# Altium PCB MainBoard.PcbDoc (part 1 of 5)
Units mm, origin at the board's own origin, x right, y up, seen from the top; angles counter-clockwise.
Board outline 82.5 x 82.5 mm, 2 copper layers (Top Layer, Bottom Layer); 145 components, 141 nets, 702 pads, 289 vias.
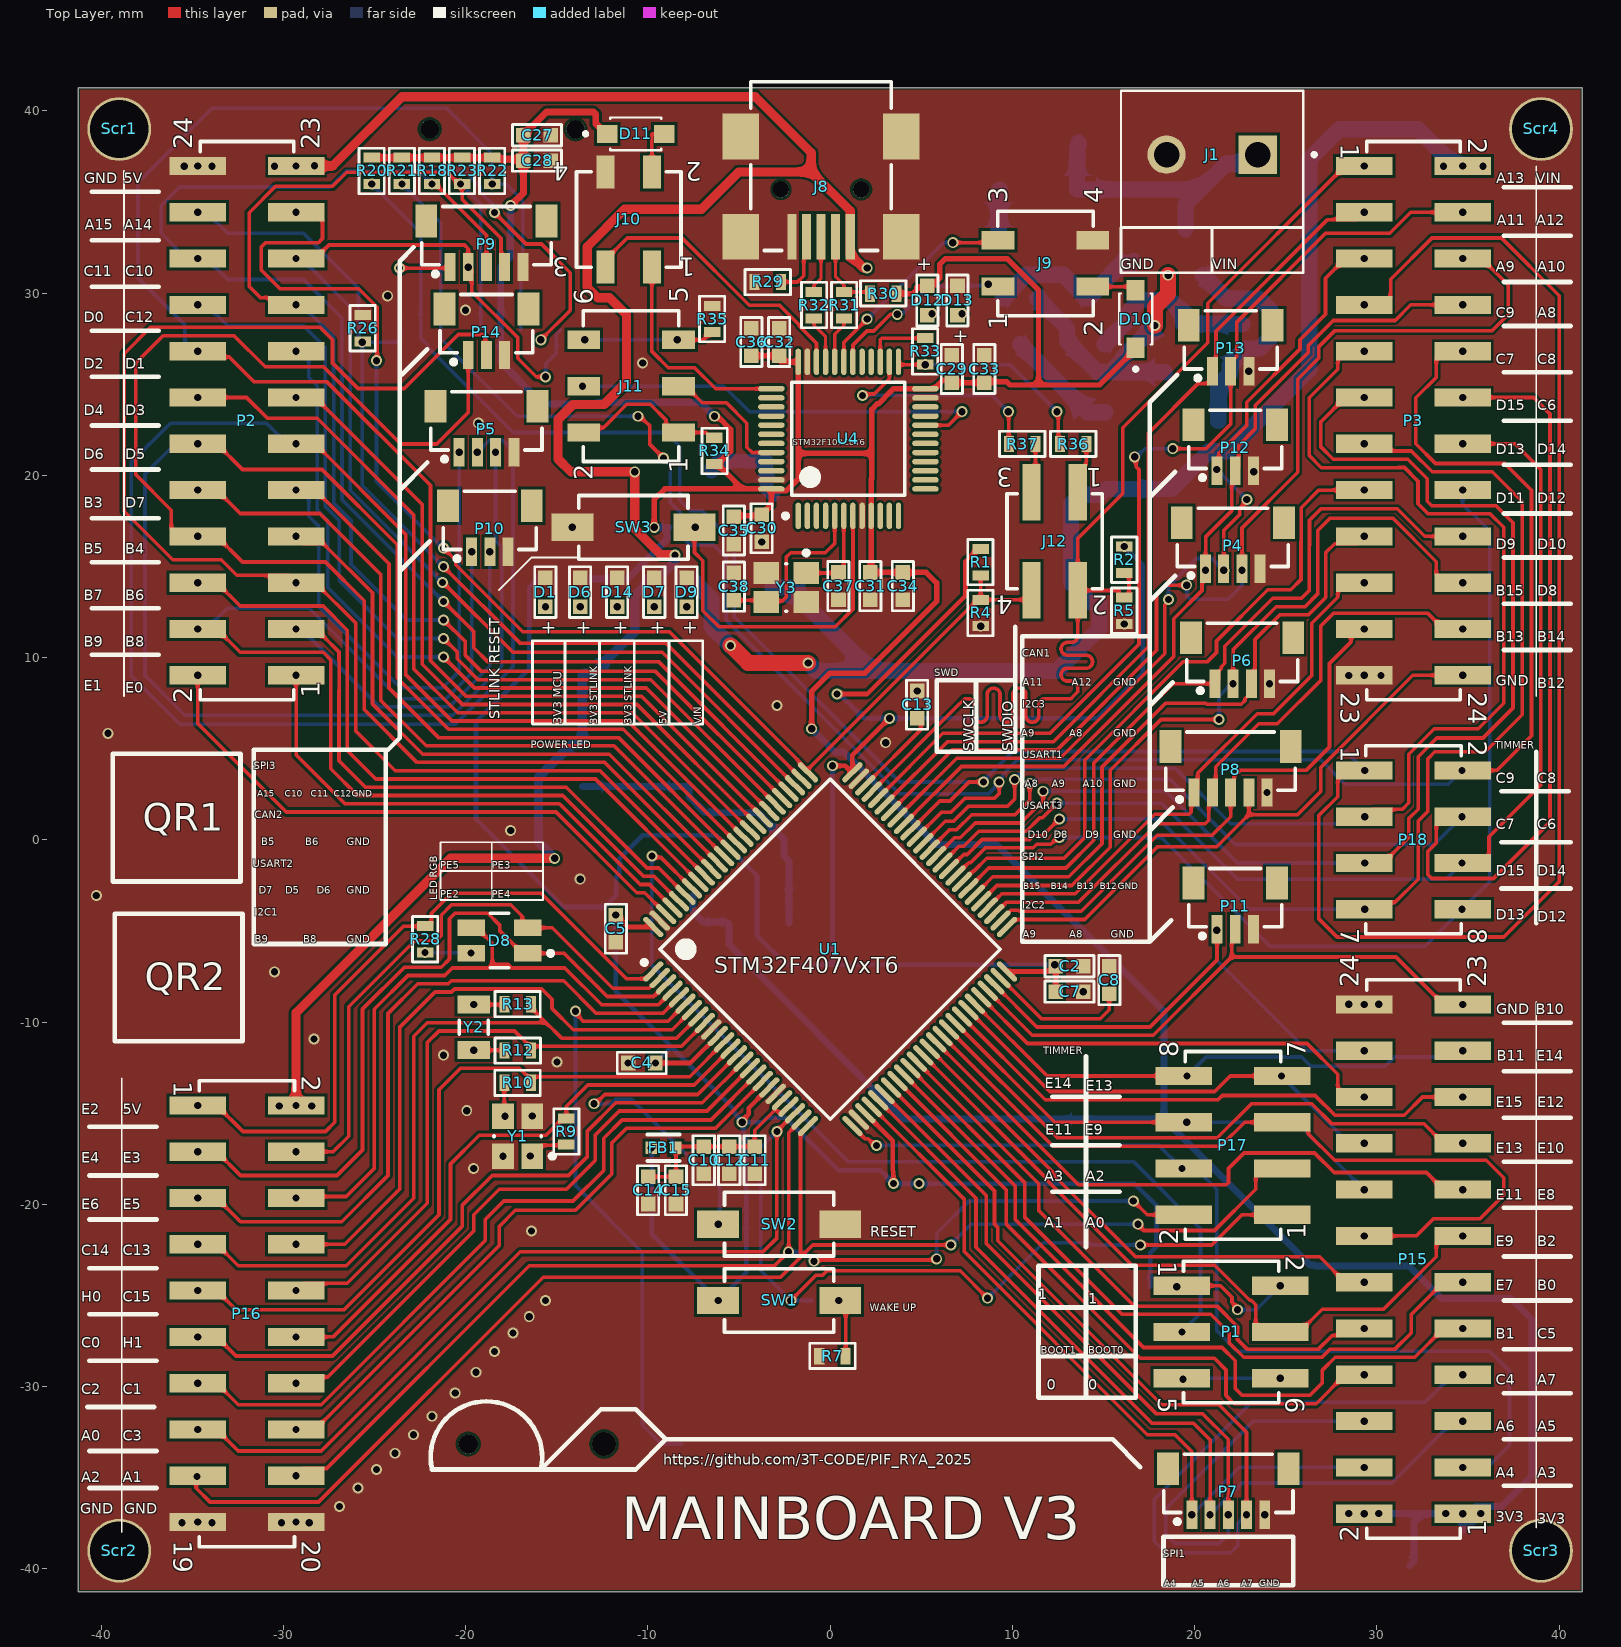
[diagram p0: Top Layer view]
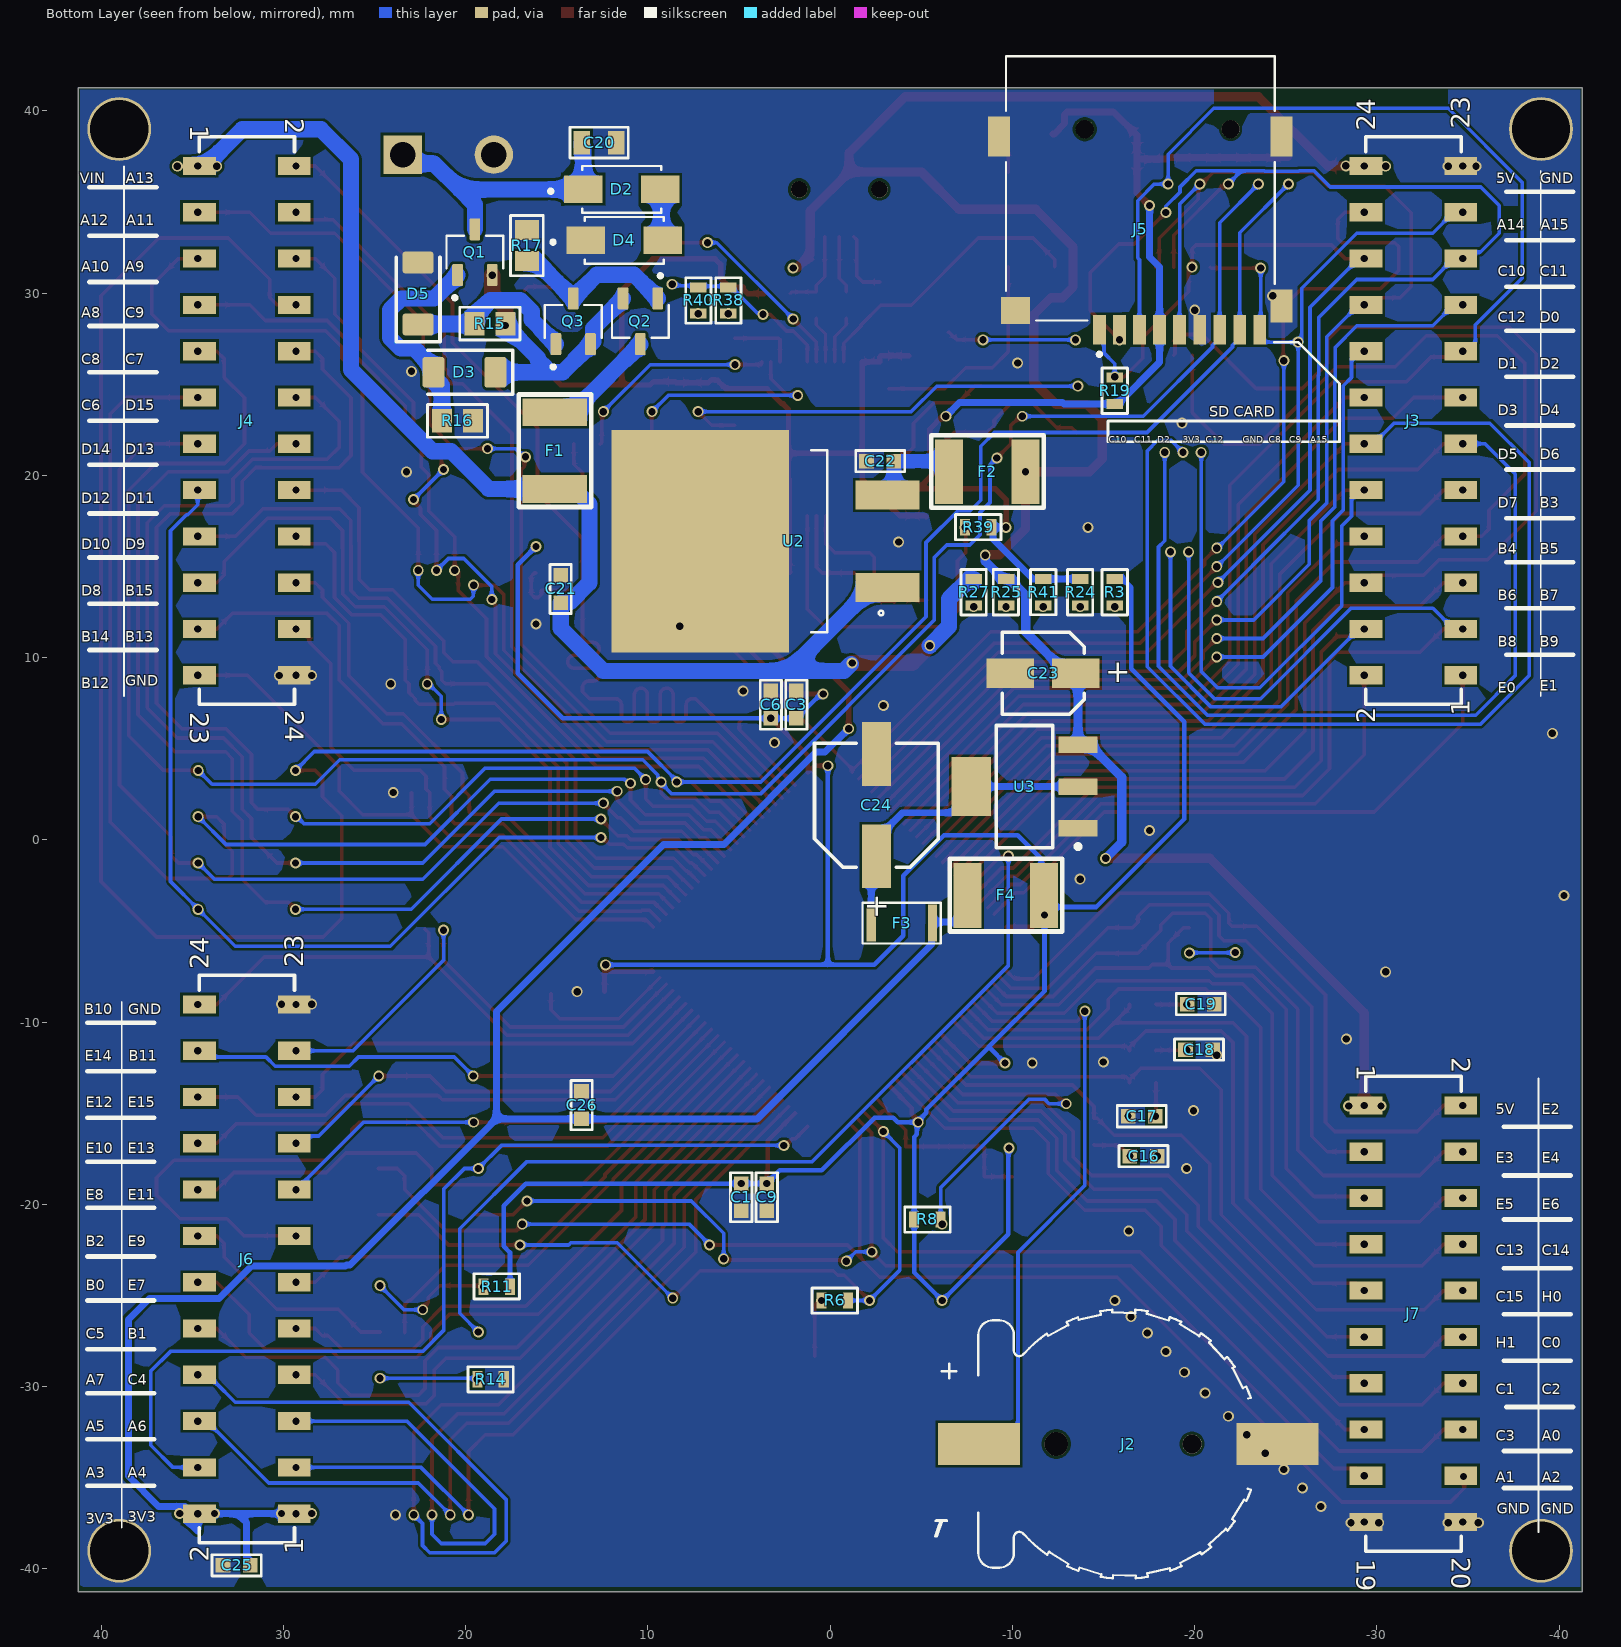
[diagram p1: Bottom Layer view, seen from below]
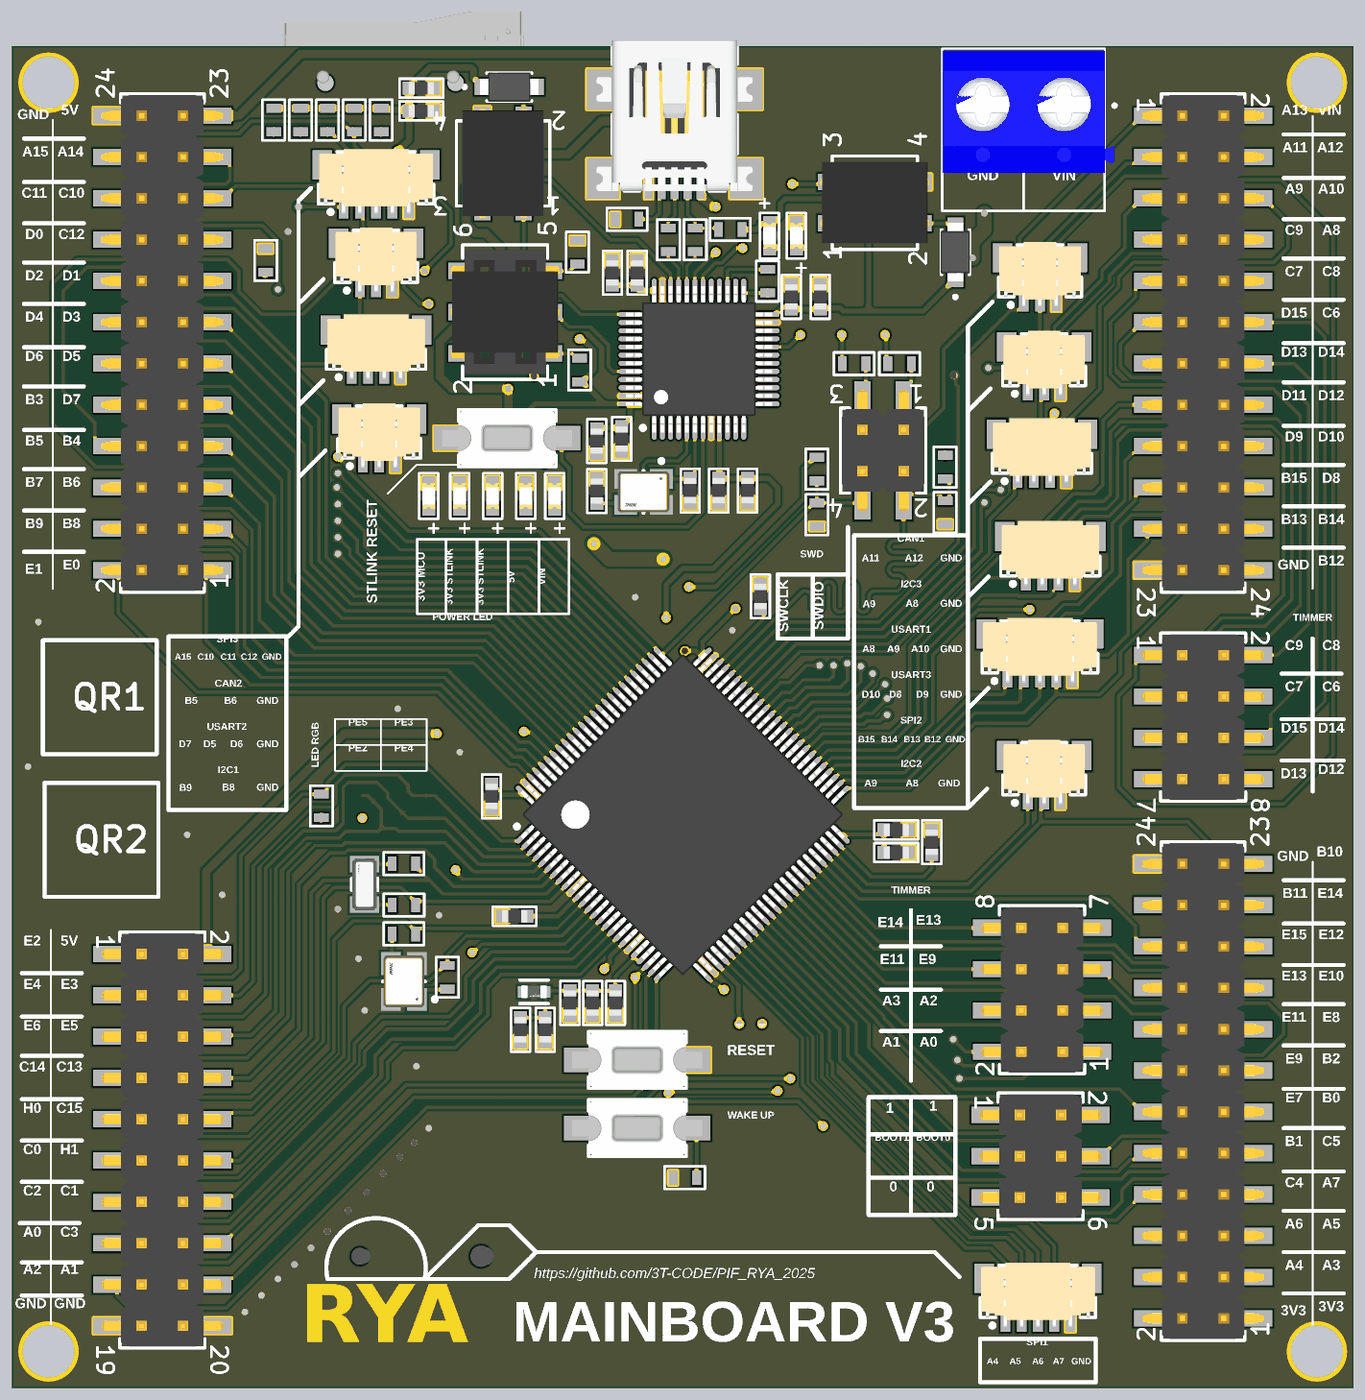
[diagram p4: 3D render of the assembled board from above, using the file's embedded part models]
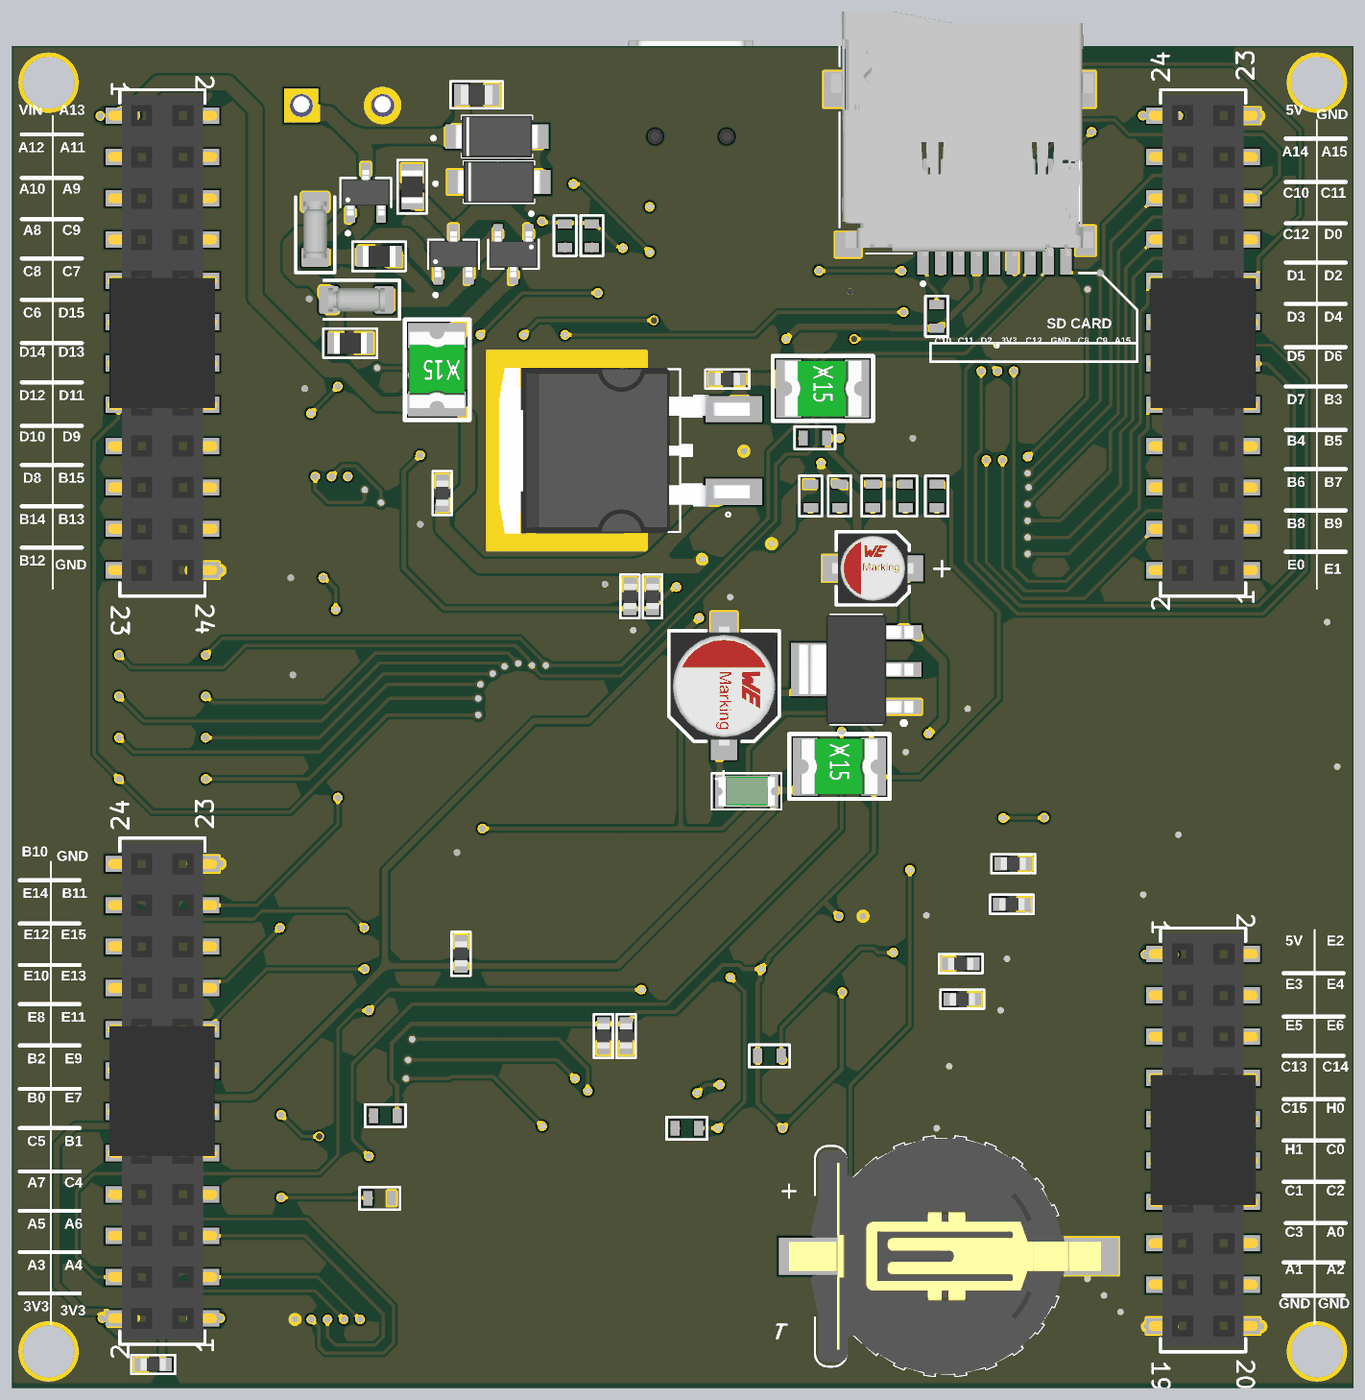
[diagram p5: 3D render of the assembled board from below, using the file's embedded part models]

## Layer stack, top to bottom
Top Solder: solder mask 0.0102, Solder Resist, Dk 3.5
Top Layer: signal copper 0.0356
Dielectric 1: dielectric 0.32, FR-4, Dk 4.8
Bottom Layer: signal copper 0.0356
Bottom Solder: solder mask 0.0102, Solder Resist, Dk 3.5

## Board outline
-41.25,-41.25 -41.25,41.25 41.25,41.25 41.25,-41.25

## Design rules (kind name [scope] priority, off if disabled: settings)
Clearance Polygon_Clearance [InPolygon] p1: gap=0.15 ignorepadtopadclearanceinfootprint=FALSE
Clearance [All] p2: gap=0.254 ignorepadtopadclearanceinfootprint=FALSE except(0.1: Arc-SMDPad SMDPad-SMDPad; 0.15: Arc-Poly Track-Poly SMDPad-Poly THPad-Poly Via-Poly Fill-Poly Poly-Poly; 0.2: Track-SMDPad)
DiffPairsRouting "Schematic Differential Pairs Routing" [InNetClass('STLINK')] p1: maxlimit=0.254 minlimit=0.254 mostfreqgap=0.254 toplayer_minwidth=0.178 toplayer_maxwidth=0.254 toplayer_prefwidth=0.178 bottomlayer_minwidth=0.178 bottomlayer_maxwidth=0.254 bottomlayer_prefwidth=0.178 maxuncoupledlength=12.7
DiffPairsRouting [All] p2: maxlimit=0.254 minlimit=0.254 mostfreqgap=0.254 toplayer_minwidth=0.381 toplayer_maxwidth=0.381 toplayer_prefwidth=0.381 bottomlayer_minwidth=0.381 bottomlayer_maxwidth=0.381 bottomlayer_prefwidth=0.381 maxuncoupledlength=12.7
MatchedLengths "Schematic Matched Net Lengths_7" [InNetClass('STL_SWD1')] p1: tolerance=25.4 checknetsindiffpair=FALSE checkdiffpairvsdiffpair=TRUE checkxsignals=TRUE checkothers=TRUE usedelayunits=TRUE delaytolerance=50.000000
MatchedLengths "Schematic Matched Net Lengths_6" [InNetClass('STL_SWD2')] p2: tolerance=25.4 checknetsindiffpair=FALSE checkdiffpairvsdiffpair=TRUE checkxsignals=TRUE checkothers=TRUE usedelayunits=TRUE delaytolerance=50.000000
MatchedLengths "Schematic Matched Net Lengths" [InNetClass('STL_SWD3')] p3: tolerance=25.4 checknetsindiffpair=FALSE checkdiffpairvsdiffpair=TRUE checkxsignals=TRUE checkothers=TRUE usedelayunits=TRUE delaytolerance=50.000000
MatchedLengths "Schematic Matched Net Lengths_5" [InNetClass('MCU_SWD')] p4: tolerance=25.4 checknetsindiffpair=FALSE checkdiffpairvsdiffpair=TRUE checkxsignals=TRUE checkothers=TRUE usedelayunits=TRUE delaytolerance=70.000000
MatchedLengths "Schematic Matched Net Lengths_4" [InNet('NetJ12_1')] p5: tolerance=25.4 checknetsindiffpair=FALSE checkdiffpairvsdiffpair=TRUE checkxsignals=TRUE checkothers=TRUE usedelayunits=TRUE delaytolerance=70.000000
MatchedLengths "Schematic Matched Net Lengths_3" [InNet('STM32_SWDIO')] p6: tolerance=25.4 checknetsindiffpair=FALSE checkdiffpairvsdiffpair=TRUE checkxsignals=TRUE checkothers=TRUE usedelayunits=TRUE delaytolerance=70.000000
MatchedLengths "Schematic Matched Net Lengths_2" [InNet('STM32_SWCLK')] p7: tolerance=25.4 checknetsindiffpair=FALSE checkdiffpairvsdiffpair=TRUE checkxsignals=TRUE checkothers=TRUE usedelayunits=TRUE delaytolerance=70.000000
MatchedLengths "Schematic Matched Net Lengths_1" [InNet('NetJ12_3')] p8: tolerance=25.4 checknetsindiffpair=FALSE checkdiffpairvsdiffpair=TRUE checkxsignals=TRUE checkothers=TRUE usedelayunits=TRUE delaytolerance=70.000000
PolygonConnect [All] p1: connectstyle=Direct reliefconductorwidth=0.254 reliefentries=4 polygonreliefangle="90 Angle" airgapwidth=0.254
RoutingVias [All] p1: holewidth=1000 width=0.9 viastyle="Through Hole" minholewidth=0.4 minwidth=0.7 maxholewidth=0.711 maxwidth=1000
SilkToSilkClearance [All] p1: silktosilkclearance=0
SilkToSolderMaskClearance [IsPad] p1: minsilkscreentomaskgap=0 clearancetoexposedcopper=TRUE
SolderMaskExpansion [All] p1: expansion=0.102 istentingtop=FALSE
SupplyNets "Schematic Supply Nets_5" [InNet('GND')] p1: voltage=0.000
SupplyNets "Schematic Supply Nets_4" [InNet('3V3_MCU_VCCA')] p2: voltage=0.000
SupplyNets "Schematic Supply Nets_3" [InNet('HD_5V')] p3: voltage=0.000
SupplyNets "Schematic Supply Nets_2" [InNet('3V3_MCU')] p4: voltage=0.000
SupplyNets "Schematic Supply Nets_1" [InNet('3V3_STL')] p5: voltage=0.000
SupplyNets "Schematic Supply Nets" [InNet('HD_Vin')] p6: voltage=0.000
Width "Schematic Width Constraint_24" [InNet('NetC22_2')] p1: maxlimit=5.08 minlimit=0.508 preferedwidth=0.762
Width "Schematic Width Constraint_23" [InNet('NetC22_2')] p2: maxlimit=5.08 minlimit=0.508 preferedwidth=0.508
Width "Schematic Width Constraint_22" [InNet('NetC24_1')] p3: maxlimit=2.54 minlimit=0.381 preferedwidth=0.381
Width "Schematic Width Constraint_21" [InNet('GND')] p4: maxlimit=12.7 minlimit=0.762 preferedwidth=0.889 minimp=50.000000 maximp=50.000000 favimp=50.000000
Width "Schematic Width Constraint_20" [InNet('NetD2_A')] p5: maxlimit=12.7 minlimit=0.762 preferedwidth=0.889 minimp=50.000000 maximp=50.000000 favimp=50.000000
Width "Schematic Width Constraint_19" [InNet('NetC20_2')] p6: maxlimit=12.7 minlimit=0.762 preferedwidth=0.889 minimp=50.000000 maximp=50.000000 favimp=50.000000
Width "Schematic Width Constraint_18" [InNet('NetQ2_1')] p7: maxlimit=5.08 minlimit=0.762 preferedwidth=0.889
Width "Schematic Width Constraint_17" [InNet('HD_Vin')] p8: maxlimit=5.08 minlimit=0.762 preferedwidth=0.889
Width "Schematic Width Constraint_16" [InNet('NetF1_0')] p9: maxlimit=5.08 minlimit=0.762 preferedwidth=0.889
Width "Schematic Width Constraint_15" [InNet('NetD3_K')] p10: maxlimit=5.08 minlimit=0.762 preferedwidth=0.889 minimp=50.000000 maximp=50.000000 favimp=50.000000
Width "Schematic Width Constraint_14" [InNet('NetD3_A')] p11: maxlimit=5.08 minlimit=0.762 preferedwidth=0.889 minimp=50.000000 maximp=50.000000 favimp=50.000000
Width "Schematic Width Constraint_13" [InNet('GND')] p12: maxlimit=5.08 minlimit=0.762 preferedwidth=0.889 minimp=50.000000 maximp=50.000000 favimp=50.000000
Width "Schematic Width Constraint_12" [InNet('NetC20_2')] p13: maxlimit=5.08 minlimit=0.762 preferedwidth=0.889 minimp=50.000000 maximp=50.000000 favimp=50.000000
Width "Schematic Width Constraint_11" [InNet('NetD5_K')] p14: maxlimit=5.08 minlimit=0.762 preferedwidth=0.889
Width "Schematic Width Constraint_10" [InNet('GND')] p15: maxlimit=5.08 minlimit=0.508 preferedwidth=0.762
Width "Schematic Width Constraint_9" [InNet('HD_Vin')] p16: maxlimit=5.08 minlimit=0.508 preferedwidth=0.762
Width "Schematic Width Constraint_6" [InNet('HD_5V')] p17: maxlimit=5.08 minlimit=0.508 preferedwidth=0.508
Width "Schematic Width Constraint_5" [InNet('GND')] p18: maxlimit=2.54 minlimit=0.381 preferedwidth=0.381
Width "Schematic Width Constraint_4" [InNet('HD_5V')] p19: maxlimit=2.54 minlimit=0.381 preferedwidth=0.381
Width "Schematic Width Constraint_2" [InNet('3V3_STL')] p20: maxlimit=2.54 minlimit=0.254 preferedwidth=0.381
Width "Schematic Width Constraint_1" [InNet('3V3_MCU')] p21: maxlimit=2.54 minlimit=0.254 preferedwidth=0.254
Width [All] p22: maxlimit=1000 minlimit=0.18 preferedwidth=0.2
27 further rules are at their usual default settings.

## Classes and differential pairs
net class STL_SWD3: A13 A14
net class STL_SWD2: NetJ12_1 NetJ12_3
net class STL_SWD1: STM32_SWCLK STM32_SWDIO
net class STLINK: 3V3_STL A13 A14 D_N D_P Di_N Di_P GND LED_STLINK NetD10_A NetD11_A NetD12_1 NetD13_2 NetD14_2 NetJ11_1 NetJ11_5 NetJ12_1 NetJ12_3 NetR33_2 NetU4_1 NetU4_2 NetU4_3 NetU4_4 NetU4_10 NetU4_11 NetU4_12 NetU4_13 NetU4_14 NetU4_15 NetU4_16 NetU4_17 NetU4_19 NetU4_21 NetU4_22 NetU4_28 NetU4_29 NetU4_38 NetU4_39 NetU4_40 NetU4_41 NetU4_42 NetU4_43 NetU4_45 NetU4_46 RST-STM8 STL-RESET STL_BOOT0 STL_BOOT1 STL_OSC_IN STL_OSC_OUT STL_RX STL_SWCLK STL_SWDIO STM32_SWCLK STM32_SWDIO
net class STLINK_SWD: A13 A14 NetJ12_1 NetJ12_3 STM32_SWCLK STM32_SWDIO
net class POWER: 3V3_MCU 3V3_STL GND HD_5V HD_Vin NetC20_2 NetC22_2 NetC24_1 NetD2_A NetD3_A NetD3_K NetD5_K NetF1_0 NetJ2_P NetQ2_1
net class MCU_SWD: A13 A14
component class U_TopLevelDesign: J8 R29 Scr1 Scr2 Scr3 Scr4
component class U_ST-LinkV2: C37 C38 D10 D11 D12 D13 D14 J9 J10 J11 J12 R30 R31 R32 R33 R34 R35 R36 R37 R38 R39 R40 R41 SW3 U4 Y3
component class U_Power: C20 C21 C22 C23 C24 D2 D3 D4 D5 F1 F2 F3 F4 J1 J2 Q1 Q2 Q3 R15 R16 R17 U2 U3
component class U_MainMCU: C1 C2 C3 C4 C5 C6 C7 C8 C9 C10 C11 C12 C13 C14 C15 C16 C17 C18 C19 D1 FB1 P1 R1 R2 R3 R4 R5 R6 R7 R8 R9 R10 R11 R12 R13 R14 SW1 SW2 U1 Y1 Y2
component class U_Header_and_OnboardConponents: C37 C38 D6 D7 D8 D9 J3 J4 J5 J6 J7 P2 P3 P4 P5 P6 P7 P8 P9 P10 P11 P12 P13 P14 P15 P16 P17 P18 R18 R19 R20 R21 R22 R23 R24 R25 R26 R27 R28
differential pair D: +D_P -D_N
differential pair Di: +Di_P -Di_N

## Components (designator, comment, footprint, x,y, rotation, side; value= is the part's Value field where it differs from the comment)
C1 "0106031010550" CAP_0603 4.801,-19.558 r90 bottom value=100nF
C2 "0106031010550" CAP_0603 13.081,-6.858 r180 top value=100nF
C3 "0106031010550" CAP_0603 1.93,7.366 r270 bottom value=100nF
C4 "0106034751010" CAP_0603 -10.287,-12.319 r0 top value=4.7µF
C5 "0106031010550" CAP_0603 -11.684,-4.826 r90 top value=100nF
C6 "0106031010550" CAP_0603 3.327,7.366 r270 bottom value=100nF
C7 "0106031010550" CAP_0603 13.081,-8.255 r180 top value=100nF
C8 "0106032251010" CAP_0603 15.24,-7.747 r270 top value=2.2µF
C9 "0106031030550" CAP_0603 3.404,-19.558 r90 bottom value=10nF
C10 "0106031030550" CAP_0603 -6.858,-17.526 r90 top value=10nF
C11 "0106031051035" CAP_0603 -4.064,-17.526 r90 top value=1µF
C12 "0106031010550" CAP_0603 -5.461,-17.526 r90 top value=100nF
C13 "0106032251010" CAP_0603 4.699,7.366 r270 top value=2.2µF
C14 "0106031051035" CAP_0603 -9.906,-19.177 r90 top value=1µF
C15 "0106031010550" CAP_0603 -8.382,-19.177 r90 top value=100nF
C16 "0106031000550" CAP_0603 -17.145,-17.272 r0 bottom value=20pF
C17 "0106031000550" CAP_0603 -17.145,-15.24 r180 bottom value=20pF
C18 "0106031000550" CAP_0603 -20.193,-11.43 r0 bottom value=6.8pF
C19 "0106031000550" CAP_0603 -20.281,-8.941 r0 bottom value=6.8pF
C20 "0108051041050" CAP_0805 12.7,38.227 r0 bottom value=100nF
C21 "0106032241050" CAP_0603 14.859,13.716 r270 bottom value=220nF
C22 "0106031041050" CAP_0603 -2.794,20.701 r180 bottom value=100nF
C23 "10uF" WCAP-ASLI_D4H5.5 -11.684,9.144 r180 bottom value="10uF, 16V"
C24 "22uF" WCAP-ASLI_D6.3H7.7 -2.54,1.905 r270 bottom value="22uF, 63V"
C25 "0106031061010" CAP_0603 32.512,-39.878 r180 bottom value=10µF
C26 "0106031061010" CAP_0603 13.716,-14.605 r270 bottom value=10µF
C27 "0106031061010" CAP_0603 -16.129,38.735 r180 top value=10µF
C28 "0106031010550" CAP_0603 -16.129,37.338 r180 top value=100pF
C29 "0106031061010" CAP_0603 6.604,25.781 r270 top value=10µF
C30 "0106031041050" CAP_0603 -3.683,17.145 r90 top value=100nF
C31 "0106031061010" CAP_0603 2.286,13.97 r90 top value=10µF
C32 "0106031041050" CAP_0603 -2.879,27.26 r270 top value=100nF
C33 "0106031061010" CAP_0603 8.382,25.781 r270 top value=10µF
C34 "0106031041050" CAP_0603 4.064,13.97 r90 top value=100nF
C35 "0106031051016" CAP_0603 -5.207,17.018 r90 top value=1µF
C36 "0106031030550" CAP_0603 -4.403,27.26 r270 top value=10nF
C37 "0106031000550" CAP_0603 0.533,13.97 r90 top value=20pF
C38 "0106031000550" CAP_0603 -5.359,13.843 r270 top value=20pF
D1 "160603RedClear" WL-SMCW_0603_H=0.7mm -15.621,13.589 r270 top value="Red, 2V"
D2 "SMAJ18A" DIOM4325X250N 11.43,35.687 r180 bottom
D3 "ZMM18" SOD-80_MiniMELF_Glass 20.066,25.654 r0 bottom value=Shottky-Diode
D4 "SMAJ18A" DIOM4325X250N 11.303,32.893 r180 bottom
D5 "ZMM18" SOD-80_MiniMELF_Glass 22.606,29.972 r90 bottom value=Shottky-Diode
D6 "160603RedClear" WL-SMCW_0603_H=0.7mm -13.716,13.589 r270 top value="Red, 2V"
D7 "160603RedClear" WL-SMCW_0603_H=0.7mm -9.652,13.589 r270 top value="Red, 2V"
D8 "CMP-1431-00001-2" WL-SFTW_3528_150141M173100 -1288.135,-1275.526 r180 top
D9 "160603RedClear" WL-SMCW_0603_H=0.7mm -7.874,13.589 r270 top value="Red, 2V"
D10 "1N5819W" 1N5819W 16.764,28.575 r90 top
D11 "1N5819W" 1N5819W -10.668,38.735 r0 top
D12 "160603BlueClear" WL-SMCW_0603_H=0.7mm 5.334,29.591 r90 top value="Blue, 3.2V"
D13 "160603WhiteBlur" WL-SMCW_0603_H=0.7mm 6.985,29.591 r270 top value=White
D14 "160603RedBlur" WL-SMCW_0603_H=0.7mm -11.684,13.589 r270 top value="Red, 2V"
F1 "MF-MSMF110/16-2" Fuse_SMD_1812 15.113,21.336 r270 bottom value="16V, 1.1A"
F2 "MF-MSMF050-2" Fuse_SMD_1812 -8.636,20.193 r180 bottom value="15V, 0.5A"
F3 "MF-NSMF035-2" Fuse_SMD_1206 -3.937,-4.572 r180 bottom value="6V, 0.35A"
F4 "MINISMDC020F" Fuse_SMD_1812 -9.652,-3.048 r180 bottom value="30V, 0.2A"
FB1 "120R , 0805" FP-BLM18-0_15-t0_8-MFG -9.144,-16.891 r0 top
J1 "KF301-2P" HANDSON_KF301-2P 20.955,37.592 r180 top
J2 "S8411-45R" HARWIN_S8411-45R -16.129,-33.147 r270 bottom
J3 "61032421821" 61032421821 -32,23 r90 bottom
J4 "61032421821" 61032421821 32,23 r270 bottom
J5 "MSD-4-A" CUI_MSD-4-A -17.021,35.739 r0 bottom
J6 "61032421821" 61032421821 32,-23 r90 bottom
J7 "61032021821" 61032021821 -32,-26 r270 bottom
J8 "65100516121" 65100516121 -0.5,36.962 r180 top value="Mini USB 2.0 Type B"
J9 "FEMALE,SMT" 61000421821 11.811,31.623 r90 top
J10 "FEMALE,SMT" 61000421821 -11.049,34.036 r180 top
J11 "FEMALE,SMT" 61030621821 -10.922,24.892 r90 top
J12 "61030421121" 61030421121 12.319,16.383 r180 top
P1 "MALE,SMT" 61030621121 22,-27 r270 top
P2 "61002421121" 61002421121 -32,23 r90 top
P3 "61002421121" 61002421121 32,23 r270 top
P4 "665304124022" 665304124022 22.092,16.599 r0 top value="1A, 125 V (AC)"
P5 "665304124022" 665304124022 -18.857,22.987 r0 top value="1A, 125 V (AC)"
P6 "665304124022" 665304124022 22.606,10.287 r0 top value="1A, 125 V (AC)"
P7 "665305124022" 665305124022 21.844,-35.306 r0 top value="1A, 125 V (AC)"
P8 "665305124022" 665305124022 21.971,4.318 r0 top value="1A, 125 V (AC)"
P9 "665305124022" 665305124022 -18.857,33.147 r0 top value="1A, 125 V (AC)"
P10 "665303124022" 665303124022 -18.669,17.526 r0 top value="1A, 125 V (AC)"
P11 "665303124022" 665303124022 22.225,-3.175 r0 top value="1A, 125 V (AC)"
P12 "665303124022" 665303124022 22.225,21.971 r0 top value="1A, 125 V (AC)"
P13 "665303124022" 665303124022 21.971,27.432 r0 top value="1A, 125 V (AC)"
P14 "665303124022" 665303124022 -18.857,28.321 r0 top value="1A, 125 V (AC)"
P15 "61002421121" 61002421121 32,-23 r90 top
P16 "61032021121" 61032021121 -32,-26 r270 top
P17 "61030821121" 61030821121 22.098,-16.764 r90 top
P18 "61030821121" 61030821121 32,0 r270 top
Q1 "AO3407A" SOT95P280X125-3N 19.492,32.243 r90 bottom
Q2 "AO3407A" SOT95P280X125-3N 10.414,28.448 r270 bottom
Q3 "AO3407A" SOT95P280X125-3N 14.097,28.448 r90 bottom
R1 "0006031031" resistor_0603 8.255,15.24 r90 top value="10 KOhm, 1/4 W"
R2 "0006031031" resistor_0603 16.143,15.367 r90 top value="10 KOhm, 1/4 W"
R3 "0006031221" resistor_0603 -15.621,13.589 r90 bottom value="1.2 KOhm, 1/4 W"
R4 "0006031031" resistor_0603 8.255,12.446 r90 top value="10 KOhm, 1/4 W"
R5 "0006031031" resistor_0603 16.143,12.573 r90 top value="10 KOhm, 1/4 W"
R6 "0006030001" resistor_0603 -0.254,-25.273 r0 bottom value="0 Ohm, 1/4 W"
R7 "0006031031" resistor_0603 0.127,-28.321 r0 top value="10 KOhm, 1/4 W"
R8 "0006031031" resistor_0603 -5.334,-20.828 r0 bottom value="10 KOhm, 1/4 W"
R9 "0006030001" resistor_0603 -14.478,-16.002 r270 top value="0 Ohm, 1/4 W"
R10 "0006030001" resistor_0603 -17.15,-13.335 r0 top value="0 Ohm, 1/4 W"
R11 "0006031031" resistor_0603 18.288,-24.511 r180 bottom value="10 KOhm, 1/4 W"
R12 "0006030001" resistor_0603 -17.145,-11.557 r180 top value="0 Ohm, 1/4 W"
R13 "0006030001" resistor_0603 -17.145,-9.017 r0 top value="0 Ohm, 1/4 W"
R14 "0006031031" resistor_0603 18.632,-29.591 r0 bottom value="10 KOhm, 1/4 W"
R15 "0008051031" RESISTOR_0805 18.669,28.321 r180 bottom value="10 KOhm, 1/8 W"
R16 "0008051031" RESISTOR_0805 20.447,22.987 r0 bottom value="10 KOhm, 1/8 W"
R17 "0008051031" RESISTOR_0805 16.637,32.6 r270 bottom value="10 KOhm, 1/8 W"
R18 "0006031031" resistor_0603 -21.844,36.703 r90 top value="10 KOhm, 1/4 W"
R19 "0006031031" resistor_0603 -15.607,24.638 r270 bottom value="10 KOhm, 1/4 W"
R20 "0006031031" resistor_0603 -25.146,36.703 r90 top value="10 KOhm, 1/4 W"
R21 "0006031031" resistor_0603 -23.495,36.703 r90 top value="10 KOhm, 1/4 W"
R22 "0006031031" resistor_0603 -18.542,36.703 r90 top value="10 KOhm, 1/4 W"
R23 "0006031031" resistor_0603 -20.193,36.703 r90 top value="10 KOhm, 1/4 W"
R24 "0006031221" resistor_0603 -13.716,13.589 r90 bottom value="1.2 KOhm, 1/4 W"
R25 "0006031221" resistor_0603 -9.652,13.589 r90 bottom value="1.2 KOhm, 1/4 W"
R26 "0006031031" resistor_0603 -25.654,28.067 r270 top value="10 KOhm, 1/4 W"
R27 "0006031221" resistor_0603 -7.874,13.589 r90 bottom value="1.2 KOhm, 1/4 W"
R28 "0006031221" resistor_0603 -22.225,-5.461 r270 top value="1.2 KOhm, 1/4 W"
R29 "0006031041" resistor_0603 -3.429,30.607 r180 top value="100 KOhm, 1/4 W"
R30 "0006031521" resistor_0603 2.921,29.972 r0 top value="1.5  KOhm, 1/4 W"
R31 "0006030001" resistor_0603 0.762,29.337 r270 top value="0 Ohm, 1/4 W"
R32 "0006030001" resistor_0603 -0.889,29.337 r270 top value="0 Ohm, 1/4 W"
R33 "0006031011" resistor_0603 5.221,26.797 r90 top value="100 Ohm, 1/4 W"
R34 "0006031031" resistor_0603 -6.35,21.336 r270 top value="10 KOhm, 1/4 W"
R35 "0006031031" resistor_0603 -6.477,28.575 r270 top value="10 KOhm, 1/4 W"
R36 "0006032001" resistor_0603 13.335,21.717 r0 top value="20 Ohm, 1/4 W"
R37 "0006032001" resistor_0603 10.541,21.717 r0 top value="20 Ohm, 1/4 W"
R38 "0006031021" resistor_0603 5.588,29.591 r270 bottom value="1 KOhm, 1/4 W"
R39 "0006031031" resistor_0603 -8.128,17.145 r180 bottom value="10 KOhm, 1/4 W"
R40 "0006031021" resistor_0603 7.239,29.591 r270 bottom value="1 KOhm, 1/4 W"
R41 "0006031021" resistor_0603 -11.684,13.589 r270 bottom value="1 KOhm, 1/4 W"
Scr1 "MP3.2" MP3.2 -39,39 r0 top
Scr2 "MP3.2" MP3.2 -39,-39 r0 top
Scr3 "MP3.2" MP3.2 39,-39 r0 top
Scr4 "MP3.2" MP3.2 39,39 r0 top
SW1 "434111050826" WS-TASV_L6W3.5H5_4341x10508x6 -2.794,-25.273 r180 top
SW2 "434111050826" WS-TASV_L6W3.5H5_4341x10508x6 -2.794,-21.082 r180 top
SW3 "434111050826" WS-TASV_L6W3.5H5_4341x10508x6 -10.795,17.145 r0 top
U1 "STM32F407VxTx" STM32F407VGTx 0,-6 r45 top value=STM32F407VGTx
U2 "L7805ACD2T_TO-263" TO-263 3.556,16.383 r0 bottom value="5V, 1.5A"
U3 "AMS1117-3.3V" "AMS1117-3.3V SOT223" -10.668,2.921 r0 bottom value="3.3V, 1A"
U4 "STM32F103C8T6" STM32F103C8T6 1,22 r90 top
Y1 "25Mhz, 3225" FP-NX3225SA-MFG -17.145,-16.256 r90 top
Y2 "32.7680Khz , 3215" FP-FC-135-MFG -19.558,-10.287 r90 top
Y3 "8Mhz, 3225" FP-NX3225SA-MFG -2.413,13.843 r180 top

## Footprints (in the part's own frame and the unit in brackets; to place one, negate y for a bottom-side part, rotate by r counter-clockwise, add the part's x,y. Pads: shape width x height; smd on the part's side, far side on the other; paste and mask are expansions set on the pad)
1N5819W [mm]
  rect 1.12x0.99 smd: A(1.57,0) K(-1.57,0)
  silkscreen extent -2.85,-0.9 1.4,0.9, body extent -1.8,-0.9 1.8,0.9, height 1.1
61000421821 [mm] "Socket Header, Pitch 2.54 mm, SMT, Vertical, dual row, 4p"
  rect 1x1.8 smd: 1(-1.27,2.6) 2(-1.27,-2.6) 3(1.27,2.6) 4(1.27,-2.6)
  silkscreen extent -2.87,-2.62 2.87,2.62, body extent -2.54,-3.35 2.54,3.35, height 8.5
61002421121 [mm] "Pin Header, pitch 2.54 mm, SMD, Vertical, dual row, 24p"
  rect 1x3.1 smd: 1(-13.97,-2.7) 2(-13.97,2.7) 3(-11.43,-2.7) 4(-11.43,2.7) 5(-8.89,-2.7) 6(-8.89,2.7) 7(-6.35,-2.7) 8(-6.35,2.7) 9(-3.81,-2.7) 10(-3.81,2.7) 11(-1.27,-2.7) 12(-1.27,2.7) 13(1.27,-2.7) 14(1.27,2.7) 15(3.81,-2.7) 16(3.81,2.7) 17(6.35,-2.7) 18(6.35,2.7) 19(8.89,-2.7) 20(8.89,2.7) 21(11.43,-2.7) 22(11.43,2.7) 23(13.97,-2.7) 24(13.97,2.7)
  silkscreen extent -15.32,-2.56 15.32,2.57, body extent -15.24,-3.75 15.24,3.75, height 9.62
61030421121 [mm] "Pin Header, pitch 2.54 mm, SMD, Vertical, dual row, 4p"
  rect 1x3.1 smd: 1(-1.27,-2.7) 2(-1.27,2.7) 3(1.27,-2.7) 4(1.27,2.7)
  silkscreen extent -2.62,-2.62 2.62,2.62, body extent -2.54,-3.75 2.54,3.75, height 9.62
61030621121 [mm] "Pin Header, pitch 2.54 mm, SMD, Vertical, dual row, 6p"
  rect 1x3.1 smd: 1(-2.54,-2.7) 2(-2.54,2.7) 3(0,-2.7) 4(0,2.7) 5(2.54,-2.7) 6(2.54,2.7)
  silkscreen extent -3.89,-2.62 3.89,2.62, body extent -3.81,-3.75 3.81,3.75, height 9.62
61030621821 [mm] "Socket Header, Pitch 2.54 mm, SMT, Vertical, dual row, 6p"
  rect 1x1.8 smd: 1(-2.54,-2.6) 2(-2.54,2.6) 3(0,-2.6) 4(0,2.6) 5(2.54,-2.6) 6(2.54,2.6)
  silkscreen extent -4.14,-2.62 4.14,2.62, body extent -3.81,-3.35 3.81,3.35, height 8.52
61030821121 [mm] "Pin Header, pitch 2.54 mm, SMD, Vertical, dual row, 8p"
  rect 1x3.1 smd: 1(-3.81,-2.7) 2(-3.81,2.7) 3(-1.27,-2.7) 4(-1.27,2.7) 5(1.27,-2.7) 6(1.27,2.7) 7(3.81,-2.7) 8(3.81,2.7)
  silkscreen extent -5.16,-2.62 5.16,2.62, body extent -5.08,-3.75 5.08,3.75, height 9.62
61032021121 [mm] "Pin Header, pitch 2.54 mm, SMD, Vertical, dual row, 20p"
  rect 1x3.1 smd: 1(-11.43,-2.7) 2(-11.43,2.7) 3(-8.89,-2.7) 4(-8.89,2.7) 5(-6.35,-2.7) 6(-6.35,2.7) 7(-3.81,-2.7) 8(-3.81,2.7) 9(-1.27,-2.7) 10(-1.27,2.7) 11(1.27,-2.7) 12(1.27,2.7) 13(3.81,-2.7) 14(3.81,2.7) 15(6.35,-2.7) 16(6.35,2.7) 17(8.89,-2.7) 18(8.89,2.7) 19(11.43,-2.7) 20(11.43,2.7)
  silkscreen extent -12.78,-2.62 12.78,2.62, body extent -12.7,-3.75 12.7,3.75, height 9.62
61032021821 [mm] "Socket Header, Pitch 2.54 mm, SMT, Vertical, dual row, 20p"
  rect 1x1.8 smd: 1(-11.43,-2.6) 2(-11.43,2.6) 3(-8.89,-2.6) 4(-8.89,2.6) 5(-6.35,-2.6) 6(-6.35,2.6) 7(-3.81,-2.6) 8(-3.81,2.6) 9(-1.27,-2.6) 10(-1.27,2.6) 11(1.27,-2.6) 12(1.27,2.6) 13(3.81,-2.6) 14(3.81,2.6) 15(6.35,-2.6) 16(6.35,2.6) 17(8.89,-2.6) 18(8.89,2.6) 19(11.43,-2.6) 20(11.43,2.6)
  silkscreen extent -13.03,-2.62 13.03,2.62, body extent -12.7,-3.35 12.7,3.35, height 8.52
61032421821 [mm] "Socket Header, Pitch 2.54 mm, SMT, Vertical, dual row, 24p"
  rect 1x1.8 smd: 1(-13.97,-2.6) 2(-13.97,2.6) 3(-11.43,-2.6) 4(-11.43,2.6) 5(-8.89,-2.6) 6(-8.89,2.6) 7(-6.35,-2.6) 8(-6.35,2.6) 9(-3.81,-2.6) 10(-3.81,2.6) 11(-1.27,-2.6) 12(-1.27,2.6) 13(1.27,-2.6) 14(1.27,2.6) 15(3.81,-2.6) 16(3.81,2.6) 17(6.35,-2.6) 18(6.35,2.6) 19(8.89,-2.6) 20(8.89,2.6) 21(11.43,-2.6) 22(11.43,2.6) 23(13.97,-2.6) 24(13.97,2.6)
  silkscreen extent -15.57,-2.62 15.57,2.62, body extent -15.24,-3.35 15.24,3.35, height 8.52
65100516121 [mm] "Mini USB 2.0 Type B SMT Horizontal 5 Contacts"
  rect 0.5x2.5 smd: 1(-1.6,3.875) 2(-0.8,3.875) 3(0,3.875) 4(0.8,3.875) 5(1.6,3.875)
  round 0.9 hole 0.9 unplated: MH1(-2.2,1.275) MH2(2.2,1.275)
  rect 2x2.5 smd: Shell(-4.4,3.875) Shell(-4.4,-1.625) Shell(4.4,3.875) Shell(4.4,-1.625)
  silkscreen extent -3.85,-4.62 3.85,4.62, body extent -4.8,-4.62 4.8,4.63, height 3.92
665303124022 [mm] "1.00 mm SMT Male Vertical Shrouded Header, 3p"
  rect 0.6x1.55 smd: 1(-1,-1.725) 2(0,-1.725) 3(1,-1.725)
  rect 1.2x1.8 smd: MP1(-2.3,0.8) MP2(2.3,0.8)
  silkscreen extent -2.55,-2.22 2.55,1.6, body extent -2.5,-2.19 2.5,1.77, height 4.79
665304124022 [mm] "1.00 mm SMT Male Vertical Shrouded Header, 4p"
  rect 0.6x1.55 smd: 1(-1.5,-1.725) 2(-0.5,-1.725) 3(0.5,-1.725) 4(1.5,-1.725)
  rect 1.2x1.8 smd: MP1(-2.8,0.8) MP2(2.8,0.8)
  silkscreen extent -3.05,-2.22 3.05,1.6, body extent -3,-2.19 3,1.77, height 4.79
665305124022 [mm] "1.00 mm SMT Male Vertical Shrouded Header, 5p"
  rect 0.6x1.55 smd: 1(-2,-1.725) 2(-1,-1.725) 3(0,-1.725) 4(1,-1.725) 5(2,-1.725)
  rect 1.2x1.8 smd: MP1(-3.3,0.8) MP2(3.3,0.8)
  silkscreen extent -3.55,-2.22 3.55,1.6, body extent -3.5,-2.19 3.5,1.77, height 4.79
"AMS1117-3.3V SOT223" [mm] "SOT223, 4-Leads, Body 6.51x7.00mm, Pitch 2.29mm"
  rect 2.15x0.9 smd: 1(-2.93,2.29) 2(-2.93,0) 3(-2.93,-2.29)
  rect 2.15x3.25 smd: 4(2.93,0)
  silkscreen extent -3.05,-3.35 1.55,3.41, body extent -3.5,-3.35 3.5,3.35, height 1.8
CAP_0603 [mm]
  rect 0.8x0.8 smd: 1(-0.801,0.076) 2(0.699,0.076)
  silkscreen extent -1.4,-0.51 1.3,0.66, body extent -0.85,-0.32 0.75,0.48, height 0.8
CAP_0805 [mm]
  rect 0.9x1.3 smd: 1(-0.975,-0.025) 2(0.925,-0.025)
  silkscreen extent -1.63,-0.86 1.57,0.81, body extent -1.03,-0.65 0.97,0.6, height 0.6
CUI_MSD-4-A [mm]
  rect 0.7x1.6 smd: 1(2.25,7.75) 2(1.15,7.75) 3(0.05,7.75) 4(-1.05,7.75) 5(-2.15,7.75) 6(-3.25,7.75) 7(-4.35,7.75) 8(-5.45,7.75) CD(-6.55,7.75)
  rect 1.2x1.8 smd: G1(-7.75,6.45)
  rect 1.6x1.5 smd: G2(6.85,6.7)
  rect 1.2x2.2 smd: G3(-7.75,-2.85) G4(7.75,-2.85)
  round 1 hole 1 unplated: ""(-4.95,-3.25) ""(3.05,-3.25)
  silkscreen extent -7.37,-7.25 7.37,9.2, body extent -8.25,-7.62 7.9,7.43, height 1.8
DIOM4325X250N [mm]
  rect 2.12x1.5 smd: A(2.115,0) C(-2.115,0)
  silkscreen extent -4,-1.28 2.16,1.28, body extent -2.57,-1.28 2.57,1.28, height 2.5
FP-BLM18-0_15-t0_8-MFG [mm]
  rect 0.65x0.7 smd paste+0 mask+0: 1(-0.675,0) 2(0.675,0)
  silkscreen extent -0.87,-0.72 0.87,0.72, body extent -1.1,-0.58 1.1,0.58, height 0.25
FP-FC-135-MFG [mm]
  rect 1x1.8 smd paste+0 mask+0: 1(-1.25,0) 2(1.25,0)
  silkscreen extent -0.38,-0.8 0.38,0.8, body extent -1.85,-1 1.85,1, height 0.25
FP-NX3225SA-MFG [mm]
  rect 1.4x1.2 smd paste+0 mask+0: 1(-1.1,-0.8) 2(1.1,-0.8) 3(1.1,0.8) 4(-1.1,0.8)
  silkscreen extent -1.22,-2.02 0.03,1.3, body extent -1.9,-1.5 1.9,1.5, height 0.25
Fuse_SMD_1206 [mil] "Fuse SMD, size 1206"
  rect 20x80 smd: 0(-66,0) 1(66,0)
  silkscreen extent -85,-44 84,44, body extent -69,-36 69,36, height 20
Fuse_SMD_1812 [mil] "Fuse SMD, size 1812"
  rect 60x140 smd: 0(-83.41,0) 1(82,0)
  silkscreen extent -122,-78 121,79, body extent -93,-67 93,67, height 18
HANDSON_KF301-2P [mm]
  rect 2.1x2.1 hole 1.4: 1(-2.5,0)
  round 2.1 hole 1.4: 2(2.5,0)
  silkscreen extent -5.7,-3.5 5,4, body extent -5.6,-3.37 5,4.13, height 10.13
HARWIN_S8411-45R [mm]
  rect 2.3x4.5 smd: N(0,8.425) P(0,-7.975)
  round 1.3 hole 1.3 unplated: ""(0,-3.725)
  round 1.05 hole 1.05 unplated: ""(0,3.725)
  silkscreen extent -7.37,-10 7.37,6.96, body extent -7.37,-9.6 7.37,9.6, height 4.25
MP3.2 [mm]
  round 3.5 hole 3.2: 1(0,0)
  body extent -2.75,-2.75 2.74,2.75, height 2.98
resistor_0603 [mm]
  rect 0.55x0.9 smd: 1(-0.725,0) 2(0.725,0)
  silkscreen extent -1.25,-0.69 1.24,0.7, body extent -0.8,-0.45 0.8,0.45, height 0.5
RESISTOR_0805 [mm] "Chip Resistor, 2-Leads, Body 2,00x1,20mm, IPC Medium Density"
  rect 1.1x1.3 smd: 1(-0.85,0) 2(0.85,0)
  silkscreen extent -1.65,-0.9 1.65,0.9, body extent -1,-0.65 1,0.65, height 0.45
SOD-80_MiniMELF_Glass [mm]
  rrect25% 1.2x1.7 smd: A(1.7,0) K(-1.7,0)
  silkscreen extent -2.65,-1.2 2,1.2, body extent -1.76,-0.72 1.74,0.72, height 1.45
SOT95P280X125-3N [mm]
  rrect25% 1.21x0.59 smd: 1(-1.255,0.95) 2(-1.255,-0.95) 3(1.255,0)
  silkscreen extent -2.6,-1.56 0.9,1.56, body extent -1.4,-1.45 1.4,1.45, height 1.25
STM32F103C8T6 [mm] "TSQFP, 48-Leads, Body 7.00x7.00mm, Pitch 0.50mm, IPC Medium Density"
  oval 1.45x0.3 smd: 1(-4.225,2.75) 2(-4.225,2.25) 3(-4.225,1.75) 4(-4.225,1.25) 5(-4.225,0.75) 6(-4.225,0.25) 7(-4.225,-0.25) 8(-4.225,-0.75) 9(-4.225,-1.25) 10(-4.225,-1.75) 11(-4.225,-2.25) 12(-4.225,-2.75) 25(4.225,-2.75) 26(4.225,-2.25) 27(4.225,-1.75) 28(4.225,-1.25) 29(4.225,-0.75) 30(4.225,-0.25) 31(4.225,0.25) 32(4.225,0.75) 33(4.225,1.25) 34(4.225,1.75) 35(4.225,2.25) 36(4.225,2.75)
  oval 0.3x1.45 smd: 13(-2.75,-4.225) 14(-2.25,-4.225) 15(-1.75,-4.225) 16(-1.25,-4.225) 17(-0.75,-4.225) 18(-0.25,-4.225) 19(0.25,-4.225) 20(0.75,-4.225) 21(1.25,-4.225) 22(1.75,-4.225) 23(2.25,-4.225) 24(2.75,-4.225) 37(2.75,4.225) 38(2.25,4.225) 39(1.75,4.225) 40(1.25,4.225) 41(0.75,4.225) 42(0.25,4.225) 43(-0.25,4.225) 44(-0.75,4.225) 45(-1.25,4.225) 46(-1.75,4.225) 47(-2.25,4.225) 48(-2.75,4.225)
  silkscreen extent -4.35,-3.1 3.1,3.57, body extent -4.5,-4.5 4.5,4.5, height 1.6
STM32F407VGTx [mm] "TSQFP, 100-Leads, Body 14.00x14.00mm, Pitch 0.50mm, IPC Medium Density"
  oval 1.45x0.3 smd: 1(-7.725,6) 2(-7.725,5.5) 3(-7.725,5) 4(-7.725,4.5) 5(-7.725,4) 6(-7.725,3.5) 7(-7.725,3) 8(-7.725,2.5) 9(-7.725,2) 10(-7.725,1.5) 11(-7.725,1) 12(-7.725,0.5) 13(-7.725,0) 14(-7.725,-0.5) 15(-7.725,-1) 16(-7.725,-1.5) 17(-7.725,-2) 18(-7.725,-2.5) 19(-7.725,-3) 20(-7.725,-3.5) 21(-7.725,-4) 22(-7.725,-4.5) 23(-7.725,-5) 24(-7.725,-5.5) 25(-7.725,-6) 51(7.725,-6) 52(7.725,-5.5) 53(7.725,-5) 54(7.725,-4.5) 55(7.725,-4) 56(7.725,-3.5) 57(7.725,-3) 58(7.725,-2.5) 59(7.725,-2) 60(7.725,-1.5) 61(7.725,-1) 62(7.725,-0.5) 63(7.725,0) 64(7.725,0.5) 65(7.725,1) 66(7.725,1.5) 67(7.725,2) 68(7.725,2.5) 69(7.725,3) 70(7.725,3.5) 71(7.725,4) 72(7.725,4.5) 73(7.725,5) 74(7.725,5.5) 75(7.725,6)
  oval 0.3x1.45 smd: 26(-6,-7.725) 27(-5.5,-7.725) 28(-5,-7.725) 29(-4.5,-7.725) 30(-4,-7.725) 31(-3.5,-7.725) 32(-3,-7.725) 33(-2.5,-7.725) 34(-2,-7.725) 35(-1.5,-7.725) 36(-1,-7.725) 37(-0.5,-7.725) 38(0,-7.725) 39(0.5,-7.725) 40(1,-7.725) 41(1.5,-7.725) 42(2,-7.725) 43(2.5,-7.725) 44(3,-7.725) 45(3.5,-7.725) 46(4,-7.725) 47(4.5,-7.725) 48(5,-7.725) 49(5.5,-7.725) 50(6,-7.725) 76(6,7.725) 77(5.5,7.725) 78(5,7.725) 79(4.5,7.725) 80(4,7.725) 81(3.5,7.725) 82(3,7.725) 83(2.5,7.725) 84(2,7.725) 85(1.5,7.725) 86(1,7.725) 87(0.5,7.725) 88(0,7.725) 89(-0.5,7.725) 90(-1,7.725) 91(-1.5,7.725) 92(-2,7.725) 93(-2.5,7.725) 94(-3,7.725) 95(-3.5,7.725) 96(-4,7.725) 97(-4.5,7.725) 98(-5,7.725) 99(-5.5,7.725) 100(-6,7.725)
  silkscreen extent -7.85,-6.6 6.6,6.82, body extent -8,-8 8,8, height 1.6
TO-263 [mm] "D2PAK"
  rect 3.5x1.6 smd: 1(-6.7,2.54) 2(-6.7,-2.54)
  rect 9.75x12.2 smd paste-7: 3(3.575,0)
  silkscreen extent -6.48,-5 -2.51,5, body extent -7.71,-5.1 7.71,5.1, height 4.6
WCAP-ASLI_D4H5.5 [mm] "Aluminium Electrolytic V-Chip SMT Capacitors, 4x5.5mm"
  rect 2.6x1.6 smd: 1(1.8,0) 2(-1.8,0)
  silkscreen extent -2.25,-2.25 2.25,2.25, body extent -2.5,-2.15 2.5,2.15, height 5.5
WCAP-ASLI_D6.3H7.7 [mm] "Aluminium Electrolytic V-Chip SMT Capacitors, 6.3x7.7mm"
  rect 3.5x1.6 smd: 1(2.8,0) 2(-2.8,0)
  silkscreen extent -3.4,-3.4 3.4,3.4, body extent -3.65,-3.3 3.65,3.3, height 7.7
WL-SFTW_3528_150141M173100 [mm] "SMT Full-color TOP LED Waterclear, body 3.5x2.8mm"
  rect 1.5x0.9 smd: 1(-1268.45,-1269.3) 2(-1268.45,-1270.7) 3(-1271.55,-1269.3) 4(-1271.55,-1270.7)
  silkscreen extent -1272.93,-1271.5 -1269.5,-1268.5, body extent -1271.75,-1271.4 -1268.25,-1268.6, height 1.9
WL-SMCW_0603_H=0.7mm [mm] "SMD Mono-color Chip LED, body 1.6x0.8mm"
  rect 0.8x0.8 smd: 1(-0.8,0) 2(0.8,0)
  silkscreen extent -1.4,-0.58 1.4,0.58, body extent -0.8,-0.4 0.8,0.4, height 0.7
WS-TASV_L6W3.5H5_4341x10508x6 [mm] "SMD Tact Switch, body 6x3.5mm"
  rect 2.3x1.5 smd: 1(-3.35,0) 2(3.35,0)
  silkscreen extent -3,-1.75 3,1.75, body extent -4,-1.75 4,1.75, height 5

## Part data
C1 C2 C3 C5 C6 C7 C12 C15: library part CMP-001-00209-1, "CAP, size 0603, 100 nF, 50 VDC", Manufacture Name=TDK, Manufacture SN=CGA3E2C0G1H101J080AA, Operating Temperature="-55 to +125degC", Tolerance=5%, Voltage Rating DC="50 VDC", Component Type=Standard, Design Item ID=0106031010550, Mounting Technology=SMT, Packaging="Tape and Reel", Pins=2, Size=0603, Source=Capacitor_0603_5_percent.SchLib, Supplier 1 Name=Mouser, Supplier 1 SN=810-CGA3E2C0G1H101J, Supplier 1 URL=https://www.mouser.com/ProductDetail/TDK/CGA3E2C0G1H101J080AA?qs=FxQuwy19cyBF0gUakpLdHA%3D%3D&utm_source=mouser-refine-download&utm_medium=file&utm_campaign=CGA3E2C0G1H101J080AA&utm_content=TDK, Supplier 2 Name=Digi-Key, Supplier 2 SN=445-5640-2-ND, Supplier 2 URL=https://www.digikey.com/en/products/detail/tdk-corporation/cga3e2c0g1h101j080aa/2443118, Supplier 3 Name=thegioiic, Supplier 3 SN=N/A, Supplier 3 URL=N/A
C4: library part CMP-001-00249-1, "CAP, size 0603, 4.7 uF, 10 VDC", Manufacture Name="Samsung Electro-Mechanics", Manufacture SN=CL10A475KP8NNWC, Operating Temperature="-55 to +125degC", Tolerance=10%, Voltage Rating DC="10 VDC", Component Type=Standard, Design Item ID=0106034751010, Mounting Technology=SMT, Packaging="Tape and Reel", Pins=2, Size=0603, Source=Capacitor_0603_10_percent.SchLib, Supplier 1 Name=Mouser, Supplier 1 SN=187-CL10A475KP8NNWC, Supplier 1 URL=https://www.mouser.vn/ProductDetail/Samsung-Electro-Mechanics/CL10A475KP8NNWC?qs=81r%252BiQLm7BQyXBb52PEUBA%3D%3D&utm_source=mouser-refine-download&utm_medium=file&utm_campaign=CL10A475KP8NNWC&utm_content=Samsung-Electro-Mechanics, Supplier 2 Name=Digi-Key, Supplier 2 SN=1276-CL10A475KP8NNWCTR-ND, Supplier 2 URL=https://www.digikey.com/en/products/detail/samsung-electro-mechanics/cl10a475kp8nnwc/16572736, Supplier 3 Name=thegioiic, Supplier 3 SN=N/A, Supplier 3 URL=https://www.thegioiic.com/tu-gom-0603-4-7uf-25v
C8 C13: library part CMP-001-00232-1, "CAP, size 0603, 2.2 uF, 10 VDC", Manufacture Name="Samsung Electro-Mechanics", Manufacture SN=CL10A225KP8NNWC, Operating Temperature="-55 to +125degC", Tolerance=10%, Voltage Rating DC="10 VDC", Component Type=Standard, Design Item ID=0106032251010, Mounting Technology=SMT, Packaging="Tape and Reel", Pins=2, Size=0603, Source=Capacitor_0603_10_percent.SchLib, Supplier 1 Name=Mouser, Supplier 1 SN=187-CL10A225KP8NNWC, Supplier 1 URL=https://www.mouser.vn/ProductDetail/Samsung-Electro-Mechanics/CL10A225KP8NNWC?qs=f6khj2Jg0Fj5oIVDjMV6rg%3D%3D&utm_source=mouser-refine-download&utm_medium=file&utm_campaign=CL10A225KP8NNWC&utm_content=Samsung-Electro-Mechanics, Supplier 2 Name=Digi-Key, Supplier 2 SN=1276-CL10A225KP8NNWCTR-ND, Supplier 2 URL=https://www.digikey.com/en/products/detail/samsung-electro-mechanics/cl10a225kp8nnwc/16572766, Supplier 3 Name=thegioiic, Supplier 3 SN=N/A, Supplier 3 URL=N/A
C9 C10 C36: library part CMP-001-00212-1, "CAP, size 0603, 10 nF, 50 VDC", Manufacture Name=TDK, Manufacture SN=CGA3E2C0G1H103J080AE, Operating Temperature="-55 to +125degC", Tolerance=5%, Voltage Rating DC="50 VDC", Component Type=Standard, Design Item ID=0106031030550, Mounting Technology=SMT, Packaging="Tape and Reel", Pins=2, Size=0603, Source=Capacitor_0603_5_percent.SchLib, Supplier 1 Name=Mouser, Supplier 1 SN=810-CGA3E2C0G1H103J8, Supplier 1 URL=https://www.mouser.com/ProductDetail/TDK/CGA3E2C0G1H103J080AE?qs=P1JMDcb91o6ZkMITrWTUZQ%3D%3D&utm_source=mouser-refine-download&utm_medium=file&utm_campaign=CGA3E2C0G1H103J080AE&utm_content=TDK, Supplier 2 Name=Digi-Key, Supplier 2 SN=445-CGA3E2C0G1H103J080AETR-ND, Supplier 2 URL=https://www.digikey.com/en/products/detail/tdk-corporation/cga3e2c0g1h103j080ae/11697946, Supplier 3 Name=thegioiic, Supplier 3 SN=N/A, Supplier 3 URL=N/A
C11 C14: library part CMP-001-00217-1, "CAP, size 0603, 1 uF, 35 VDC", Manufacture Name="Samsung Electro-Mechanics", Manufacture SN=CL10B105KL9VPJC, Operating Temperature="-55 to +125degC", Tolerance=10%, Voltage Rating DC="35 VDC", Component Type=Standard, Design Item ID=0106031051035, Mounting Technology=SMT, Packaging="Tape and Reel", Pins=2, Size=0603, Source=Capacitor_0603_10_percent.SchLib, Supplier 1 Name=Mouser, Supplier 1 SN=187-CL10B105KL9VPJC, Supplier 1 URL=https://www.mouser.vn/ProductDetail/Samsung-Electro-Mechanics/CL10B105KL9VPJC?qs=Jm2GQyTW%2Fbg7HPXOYntRzg%3D%3D&utm_source=mouser-refine-download&utm_medium=file&utm_campaign=CL10B105KL9VPJC&utm_content=Samsung-Electro-Mechanics, Supplier 2 Name=Digi-Key, Supplier 2 SN=N/A, Supplier 2 URL=N/A, Supplier 3 Name=thegioiic, Supplier 3 SN=N/A, Supplier 3 URL=N/A
C16 C17 C37 C38: library part CMP-001-00208-1, "CAP, size 0603, 20 pF, 50 VDC", Manufacture Name=TDK, Manufacture SN=CGA3E2NP01H100D080AA, Operating Temperature="-55 to +125degC", Tolerance=5%, Voltage Rating DC="50 VDC", Component Type=Standard, Design Item ID=0106031000550, Mounting Technology=SMT, Packaging="Tape and Reel", Pins=2, Size=0603, Source=Capacitor_0603_5_percent.SchLib, Supplier 1 Name=Mouser, Supplier 1 SN=810-CGA3E2NP01H100DA, Supplier 1 URL=https://www.mouser.com/ProductDetail/TDK/CGA3E2NP01H100D080AA?qs=xLDY6iXSiQYSDBjUp7bVxg%3D%3D&utm_source=mouser-refine-download&utm_medium=file&utm_campaign=CGA3E2NP01H100D080AA&utm_content=TDK, Supplier 2 Name=Digi-Key, Supplier 2 SN=445-12387-2-ND, Supplier 2 URL=https://www.digikey.com/en/products/detail/tdk-corporation/cga3e2np01h100d080aa/3949623, Supplier 3 Name=thegioiic, Supplier 3 SN=N/A, Supplier 3 URL=N/A
C18 C19: library part CMP-001-00208-1, "CAP, size 0603, 6.8 pF, 50 VDC", Manufacture Name=TDK, Manufacture SN=CGA3E2NP01H100D080AA, Operating Temperature="-55 to +125degC", Tolerance=5%, Voltage Rating DC="50 VDC", Component Type=Standard, Design Item ID=0106031000550, Mounting Technology=SMT, Packaging="Tape and Reel", Pins=2, Size=0603, Source=Capacitor_0603_5_percent.SchLib, Supplier 1 Name=Mouser, Supplier 1 SN=810-CGA3E2NP01H100DA, Supplier 1 URL=https://www.mouser.com/ProductDetail/TDK/CGA3E2NP01H100D080AA?qs=xLDY6iXSiQYSDBjUp7bVxg%3D%3D&utm_source=mouser-refine-download&utm_medium=file&utm_campaign=CGA3E2NP01H100D080AA&utm_content=TDK, Supplier 2 Name=Digi-Key, Supplier 2 SN=445-12387-2-ND, Supplier 2 URL=https://www.digikey.com/en/products/detail/tdk-corporation/cga3e2np01h100d080aa/3949623, Supplier 3 Name=thegioiic, Supplier 3 SN=N/A, Supplier 3 URL=N/A
C20: library part CMP-001-00259-1, "CAP, size 0805, 0.1 nF, 50 VDC", Manufacture Name=TDK, Manufacture SN=CGA4J2X8R1H104K125AD, Operating Temperature="-55 to +125degC", Tolerance=10%, Voltage Rating DC="50 VDC", Component Type=Standard, Design Item ID=0108051041050, Mounting Technology=SMT, Packaging="Tape and Reel", Pins=2, Size=0805, Source=Capacitor_0805_10_percent.SchLib, Supplier 1 Name=Mouser, Supplier 1 SN=810-C2012X8R1H104KEP, Supplier 1 URL=https://www.mouser.vn/ProductDetail/TDK/CGA4J2X8R1H104K125AD?qs=LcTL%2F5vFEzExqZqv3rh1qQ%3D%3D&utm_source=mouser-refine-download&utm_medium=file&utm_campaign=CGA4J2X8R1H104K125AD&utm_content=TDK, Supplier 2 Name=Digi-Key, Supplier 2 SN=445-8810-2-ND, Supplier 2 URL=https://www.digikey.com/en/products/detail/tdk-corporation/cga4j2x8r1h104k125ad/3248169, Supplier 3 Name=thegioiic, Supplier 3 SN=OEM, Supplier 3 URL=N/A
C21: library part CMP-001-00231-1, "CAP, size 0603, 220 nF, 50 VDC", Manufacture Name=TDK, Manufacture SN=CGA3E3X7R1H224K080AE, Operating Temperature="-55 to +125degC", Tolerance=10%, Voltage Rating DC="50 VDC", Component Type=Standard, Design Item ID=0106032241050, Mounting Technology=SMT, Packaging="Tape and Reel", Pins=2, Size=0603, Source=Capacitor_0603_10_percent.SchLib, Supplier 1 Name=Mouser, Supplier 1 SN=810-CGA3E3X7R1H224KA, Supplier 1 URL=https://www.mouser.com/ProductDetail/TDK/CGA3E3X7R1H224K080AE?qs=nQSIdc08i%252Bd73MzLq310Yg%3D%3D&utm_source=mouser-refine-download&utm_medium=file&utm_campaign=CGA3E3X7R1H224K080AE&utm_content=TDK, Supplier 2 Name=Digi-Key, Supplier 2 SN=445-173635-2-ND, Supplier 2 URL=https://www.digikey.com/en/products/detail/tdk-corporation/cga3e3x7r1h224k080ae/5809200, Supplier 3 Name=thegioiic, Supplier 3 SN=N/A, Supplier 3 URL=N/A
C22 C30 C32 C34: library part CMP-001-00214-1, "CAP, size 0603, 100 nF, 50 VDC", Manufacture Name=TDK, Manufacture SN=CGA3E3X8R1H104K080AE, Operating Temperature="-55 to +125degC", Tolerance=10%, Voltage Rating DC="50 VDC", Component Type=Standard, Design Item ID=0106031041050, Mounting Technology=SMT, Packaging="Tape and Reel", Pins=2, Size=0603, Source=Capacitor_0603_10_percent.SchLib, Supplier 1 Name=Mouser, Supplier 1 SN=810-CGA3E3X8R1H104KA, Supplier 1 URL=https://www.mouser.com/ProductDetail/TDK/CGA3E3X8R1H104K080AE?qs=nQSIdc08i%252Bd8g3IRRgU2bw%3D%3D&utm_source=mouser-refine-download&utm_medium=file&utm_campaign=CGA3E3X8R1H104K080AE&utm_content=TDK, Supplier 2 Name=Digi-Key, Supplier 2 SN=445-173697-2-ND, Supplier 2 URL=https://www.digikey.com/en/products/detail/tdk-corporation/cga3e3x8r1h104k080ae/5809262, Supplier 3 Name=thegioiic, Supplier 3 SN=N/A, Supplier 3 URL=N/A
C23: library part CMP-014-00039-1, "V-Chip, D4 x H5.5mm, 10uF, 16V", Capacitance=10µF, Capacitance Tolerance=+/-20%, Leakage Current=3uA, Manufacturer="Wurth Elektronik", Manufacturer Part Number=N/A, Operating Temperature Max=105°C, Operating Temperature Min=-55°C, Rated Voltage (DC)=16V, Ripple Current=80mA, Category="Aluminum Electrolytic Capacitors", Component Type=Standard, Design Item ID=865080340001, Diameter=4mm, Dissipation Factor=16%, Endurance=2000h, Height=5.5mm, Mount="Surface Mount", Packaging="Tape and Reel", Pins=2, Source=Al_Cap.SchLib, Supplier 1 Name=Mouser, Supplier 1 SN=710-865080340001, Supplier 1 URL=https://www.mouser.com/ProductDetail/Wurth-Elektronik/865080340001?qs=0KOYDY2FL2%252BaqRFD837lAw%3D%3D, Supplier 2 Name=Digi-Key, Supplier 2 SN=N/A, Supplier 2 URL=N/A, Supplier 3 Name=thegioiic, Supplier 3 SN=N/A, Supplier 3 URL=https://www.thegioiic.com/tu-nhom-smd-10uf-16v-4x5-4mm
C24: library part CMP-014-00073-1, "V-Chip, D6.3 x H7.7mm, 22uF, 63V", Capacitance=22µF, Capacitance Tolerance=+/-20%, Leakage Current=13.86uA, Manufacturer="Wurth Elektronik", Manufacturer Part Number=N/A, Operating Temperature Max=105°C, Operating Temperature Min=-55°C, Rated Voltage (DC)=63V, Ripple Current=58mA, Category="Aluminum Electrolytic Capacitors", Component Type=Standard, Design Item ID=865080745011, Diameter=6.3mm, Dissipation Factor=12%, Endurance=2000h, Height=7.7mm, Mount="Surface Mount", Packaging="Tape and Reel", Pins=2, Source=Al_Cap.SchLib, Supplier 1 Name=Mouser, Supplier 1 SN=710-865080745011, Supplier 1 URL=https://www.mouser.vn/ProductDetail/Wurth-Elektronik/865080745011?qs=amGC7iS6iy%2FPRPUkpVJ4xg%3D%3D, Supplier 2 Name=Digi-Key, Supplier 2 SN=N/A, Supplier 2 URL=N/A, Supplier 3 Name=thegioiic, Supplier 3 SN=N/A, Supplier 3 URL=https://www.thegioiic.com/tu-nhom-smd-22uf-63v-6-3x7-7mm
C25 C26 C27 C29 C31 C33: library part CMP-001-00219-1, "CAP, size 0603, 10 uF, 10 VDC", Manufacture Name="Samsung Electro-Mechanics", Manufacture SN=CL10A106KP8NNWC, Operating Temperature="-55 to +125degC", Tolerance=10%, Voltage Rating DC="10 VDC", Component Type=Standard, Design Item ID=0106031061010, Mounting Technology=SMT, Packaging="Tape and Reel", Pins=2, Size=0603, Source=Capacitor_0603_10_percent.SchLib, Supplier 1 Name=Mouser, Supplier 1 SN=187-CL10A106KP8NNWC, Supplier 1 URL=https://www.mouser.vn/ProductDetail/Samsung-Electro-Mechanics/CL10A106KP8NNWC?qs=xZ%2FP%252Ba9zWqZx8LSX23YqWA%3D%3D&utm_source=mouser-refine-download&utm_medium=file&utm_campaign=CL10A106KP8NNWC&utm_content=Samsung-Electro-Mechanics, Supplier 2 Name=Digi-Key, Supplier 2 SN=1276-CL10A106KP8NNWCTR-ND, Supplier 2 URL=https://www.digikey.com/en/products/detail/samsung-electro-mechanics/cl10a106kp8nnwc/16572907, Supplier 3 Name=thegioiic, Supplier 3 SN=N/A, Supplier 3 URL=https://www.thegioiic.com/tu-gom-0603-10uf-25v
C28: library part CMP-001-00209-1, "CAP, size 0603, 100 pF, 50 VDC", Manufacture Name=TDK, Manufacture SN=CGA3E2C0G1H101J080AA, Operating Temperature="-55 to +125degC", Tolerance=5%, Voltage Rating DC="50 VDC", Component Type=Standard, Design Item ID=0106031010550, Mounting Technology=SMT, Packaging="Tape and Reel", Pins=2, Size=0603, Source=Capacitor_0603_5_percent.SchLib, Supplier 1 Name=Mouser, Supplier 1 SN=810-CGA3E2C0G1H101J, Supplier 1 URL=https://www.mouser.com/ProductDetail/TDK/CGA3E2C0G1H101J080AA?qs=FxQuwy19cyBF0gUakpLdHA%3D%3D&utm_source=mouser-refine-download&utm_medium=file&utm_campaign=CGA3E2C0G1H101J080AA&utm_content=TDK, Supplier 2 Name=Digi-Key, Supplier 2 SN=445-5640-2-ND, Supplier 2 URL=https://www.digikey.com/en/products/detail/tdk-corporation/cga3e2c0g1h101j080aa/2443118, Supplier 3 Name=thegioiic, Supplier 3 SN=N/A, Supplier 3 URL=N/A
C35: library part CMP-001-00215-1, "CAP, size 0603, 1 uF, 16 VDC", Manufacture Name="Samsung Electro-Mechanics", Manufacture SN=CL10B105KO8NNWC, Operating Temperature="-55 to +125degC", Tolerance=10%, Voltage Rating DC="16 VDC", Component Type=Standard, Design Item ID=0106031051016, Mounting Technology=SMT, Packaging="Tape and Reel", Pins=2, Size=0603, Source=Capacitor_0603_10_percent.SchLib, Supplier 1 Name=Mouser, Supplier 1 SN=187-CL10B105KO8NNWC, Supplier 1 URL=https://www.mouser.vn/ProductDetail/Samsung-Electro-Mechanics/CL10B105KO8NNWC?qs=81r%252BiQLm7BT%252BXtc72qn1ug%3D%3D&utm_source=mouser-refine-download&utm_medium=file&utm_campaign=CL10B105KO8NNWC&utm_content=Samsung-Electro-Mechanics, Supplier 2 Name=Digi-Key, Supplier 2 SN=1276-CL10B105KO8NNWCTR-ND, Supplier 2 URL=https://www.digikey.com/en/products/detail/samsung-electro-mechanics/cl10b105ko8nnwc/16572783, Supplier 3 Name=thegioiic, Supplier 3 SN=N/A, Supplier 3 URL=https://www.thegioiic.com/tu-gom-0603-1uf-16v
D1 D6 D7 D9: library part CMP-004-00094-1, "WL-SMCW SMT Mono-color Chip LED Waterclear, size 0603, Red, 2V, 140deg", Color=Red, Component Type=Standard, ComponentLink1Description="Datasheet link", ComponentLink1URL=N/A, ComponentLink2Description="Supplier 1 URL", ComponentLink2URL=https://www.mouser.vn/ProductDetail/Wurth-Elektronik/150060RS75000?qs=LlUlMxKIyB3QnmZ3fw%2FVCA%3D%3D, ComponentLink3Description="Supplier 2 URL", ComponentLink3URL=https://www.digikey.com/en/products/detail/liteon/LTST-C191KRKT/386837, ComponentLink4Description="Supplier 3 URL", ComponentLink4URL=https://www.thegioiic.com/led-do-0603-dan-smd-trong-suot, Design Item ID=160603RedClear, Pins=2, Size=0603, Source=WL-SMCW_0603.SchLib, Supplier 1 Name=Mouser, Supplier 1 SN=710-150060RS75000, Supplier 1 URL=https://www.mouser.vn/ProductDetail/Wurth-Elektronik/150060RS75000?qs=LlUlMxKIyB3QnmZ3fw%2FVCA%3D%3D, Supplier 2 Name=Digi-Key, Supplier 2 SN=160-1447-2-ND, Supplier 2 URL=https://www.digikey.com/en/products/detail/liteon/LTST-C191KRKT/386837, Supplier 3 Name=ICDayRoi, Supplier 3 SN=N/A, Supplier 3 URL=https://www.thegioiic.com/led-do-0603-dan-smd-trong-suot, Type=Clear
D2 D4: library part CMP-004-00085-1, "400W, 21.1V, 5%, Unidirectional, TVS", Case/Package="SMA-2 Taiwan Semiconductor", Check_prices=https://www.snapeda.com/parts/SMAJ18A/taiwan/view-part/?ref=eda, Component Type=Standard, Design Item ID=SMAJ18A, MF="Taiwan Semiconductor", MP=SMAJ18A, Pins=2, SnapEDA_Link=https://www.snapeda.com/parts/SMAJ18A/taiwan/view-part/?ref=snap, Source=SMAJ18A.SchLib
D3 D5: library part CMP-004-00086-2, Component Type=Standard, Datasheet=https://diotec.com/de/produktliste/SBD.html, Design Item ID=Schottky-Diode, ki_description="Schottky Diode", ki_keywords=Schottky, Pins=2, Reference=D, Source=schottky-diode.SchLib
D8: library part CMP-004-00112-1, Case Code (Metric)=3528, Case/Package=1411, Color="Green, Red", Forward Current=100mA, Forward Voltage=3.2V, Max Operating Temperature=85°C, Max Reverse Voltage (DC)=5V, Min Operating Temperature=-40°C, Power Dissipation=72mW, Test Current=20mA, Component Type=Standard, Design Item ID=CMP-1431-00001-2, Dominant Wavelength=520nm, Height=1.9mm, Length=3.5mm, Lens Style="Clear, Round", Luminous Intensity=230mcd, Mount="Surface Mount", NexarPartId=29717795, Packaging="Tape and Reel", Peak Wavelength=465nm, Pin Count=4, Pins=4, REACH SVHC=Unknown, RoHS=Compliant, Source=rgb.SchLib, Viewing Angle=120°, Wavelength=470nm, Width=2.8mm
D10 D11: library part CMP-004-00113-1, Component Type=Standard, Design Item ID=1N5819W, Pins=2, Source=1N5819W.SchLib
D12: library part CMP-004-00088-1, "WL-SMCW SMT Mono-color Chip LED Waterclear, size 0603, Blue, 3.2V, 140deg", Color=Blue, Component Type=Standard, ComponentLink1Description="Datasheet link", ComponentLink1URL=N/A, ComponentLink2Description="Supplier 1 URL", ComponentLink2URL=https://www.mouser.vn/ProductDetail/Wurth-Elektronik/150060BS75003?qs=Li%252BoUPsLEnu8LvIbM48DKA%3D%3D, ComponentLink3Description="Supplier 2 URL", ComponentLink3URL=https://www.digikey.com/en/products/detail/liteon/LTST-C191TBKT/388530, ComponentLink4Description="Supplier 3 URL", ComponentLink4URL=https://www.thegioiic.com/led-xanh-duong-0603-dan-smd-trong-suot, Design Item ID=160603BlueClear, Pins=2, Size=0603, Source=WL-SMCW_0603.SchLib, Supplier 1 Name=Mouser, Supplier 1 SN=710-150060GS75000, Supplier 1 URL=https://www.mouser.vn/ProductDetail/Wurth-Elektronik/150060BS75003?qs=Li%252BoUPsLEnu8LvIbM48DKA%3D%3D, Supplier 2 Name=Digi-Key, Supplier 2 SN=160-1647-2-ND, Supplier 2 URL=https://www.digikey.com/en/products/detail/liteon/LTST-C191TBKT/388530, Supplier 3 Name=ICDayRoi, Supplier 3 SN=N/A, Supplier 3 URL=https://www.thegioiic.com/led-xanh-duong-0603-dan-smd-trong-suot, Type=Clear
D13: library part CMP-004-00095-1, "WL-SMCW SMT Mono-color Chip LED Blur, size 0603, White", Color=White, Component Type=Standard, ComponentLink1Description="Datasheet link", ComponentLink1URL=N/A, ComponentLink2Description="Supplier 1 URL", ComponentLink2URL=https://www.mouser.vn/ProductDetail/ROHM-Semiconductor/SMLEN3WBC8W1?qs=W0yvOO0ixfGun78rr9Unsw%3D%3D, ComponentLink3Description="Supplier 2 URL", ComponentLink3URL=https://www.digikey.com/en/products/detail/qt-brightek-qtb/QBLP601-IW/4814655, ComponentLink4Description="Supplier 3 URL", ComponentLink4URL=N/A, Design Item ID=160603WhiteBlur, Pins=2, Size=0603, Source=WL-SMCW_0603.SchLib, Supplier 1 Name=Mouser, Supplier 1 SN=755-SMLEN3WBC8W1, Supplier 1 URL=https://www.mouser.vn/ProductDetail/ROHM-Semiconductor/SMLEN3WBC8W1?qs=W0yvOO0ixfGun78rr9Unsw%3D%3D, Supplier 2 Name=Digi-Key, Supplier 2 SN=1516-1057-2-ND, Supplier 2 URL=https://www.digikey.com/en/products/detail/qt-brightek-qtb/QBLP601-IW/4814655, Supplier 3 Name=ICDayRoi, Supplier 3 SN=N/A, Supplier 3 URL=N/A, Type=Blur